# Altium PCB PCB2.PcbDoc
Units mm, origin at the board's own origin, x right, y up, seen from the top; angles counter-clockwise.
Board outline 23.5 x 23.5 mm, 2 copper layers (Top Layer, Bottom Layer); 5 components, 5 nets, 14 pads, 0 vias.
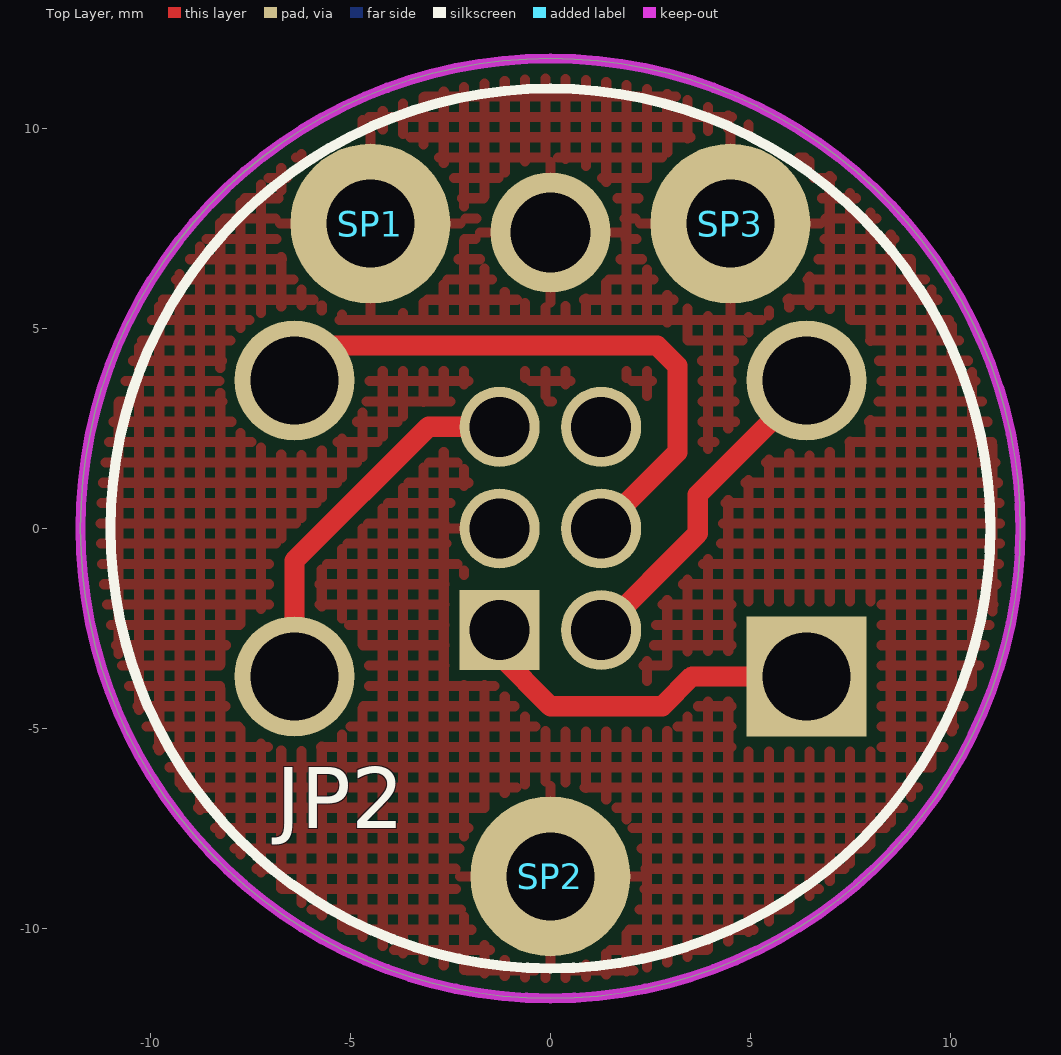
[diagram p0: Top Layer view]
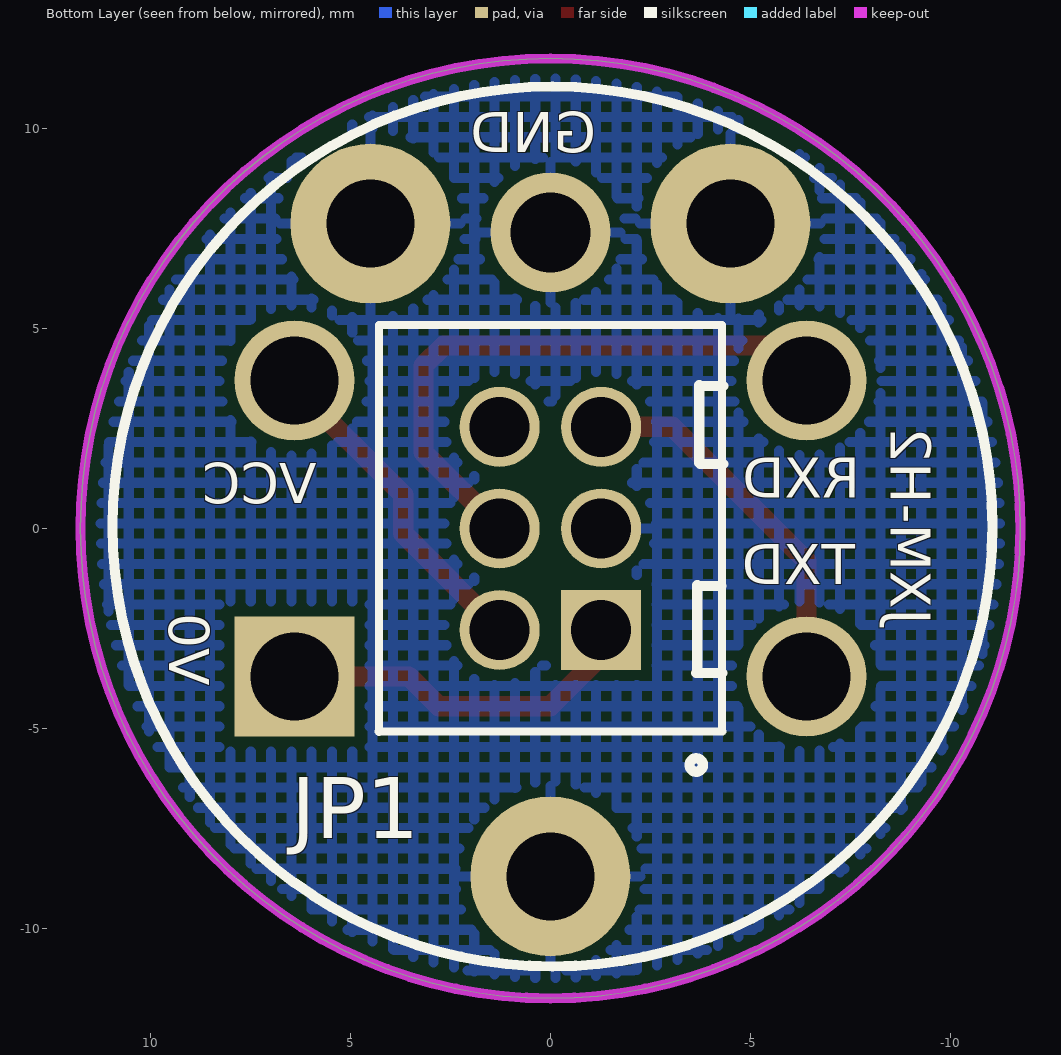
[diagram p1: Bottom Layer view, seen from below]

## Layer stack, top to bottom
Top Solder: solder mask 0.0102, Solder Resist, Dk 3.5
Top Layer: signal copper 0.0356
Dielectric 1: dielectric 0.32, FR-4, Dk 4.8
Bottom Layer: signal copper 0.0356
Bottom Solder: solder mask 0.0102, Solder Resist, Dk 3.5

## Board outline
-11.75,0 ccw(c0,0) 0,-11.75 ccw(c0,0) 11.75,0 ccw(c0,0) 0,11.75 ccw(c0,0)

## Design rules (kind name [scope] priority, off if disabled: settings)
Clearance [All] p1: gap=0.254
PolygonConnect [All] p1: connectstyle=Relief reliefconductorwidth=0.254 reliefentries=4 polygonreliefangle="90 Angle" airgapwidth=0.254
RoutingVias [All] p1: holewidth=0.711 width=1.27 viastyle="Through Hole" minholewidth=0.711 minwidth=1.27 maxholewidth=0.711 maxwidth=1.27
SolderMaskExpansion [All] p1: expansion=0.102
Width [All] p1: maxlimit=1.27 minlimit=0.254 preferedwidth=0.254
30 further rules are at their usual default settings.

## Components (designator, comment, footprint, x,y, rotation, side; value= is the part's Value field where it differs from the comment)
JP1 "Header3X2" HX25080-Y-A-PT -1.27,-2.54 r90 bottom
JP2 "HDR-1X5" JXM-H2 0,0 r0 top
SP1 "M2*5*3铜柱" M2*5*3#1 -10.287,13.97 r0 top
SP2 "M2*5*3铜柱" M2*5*3#2 -0.127,-8.763 r0 top
SP3 "M2*5*3铜柱" M2*5*3#3 4.445,7.62 r0 top

## Footprints (in the part's own frame and the unit in brackets; to place one, negate y for a bottom-side part, rotate by r counter-clockwise, add the part's x,y. Pads: shape width x height; smd on the part's side, far side on the other; paste and mask are expansions set on the pad)
HX25080-Y-A-PT [mm] "2.54双排插拔端子"
  rect 2x2 hole 1.5: 1(0,0)
  round 2 hole 1.5: 2(0,2.54) 3(2.54,0) 4(2.54,2.54) 5(5.08,0) 6(5.08,2.54)
  silkscreen extent -3.54,-3.05 7.62,5.57
JXM-H2 [mm] "电化学氢气传感器"
  rect 3x3 hole 2.2: 1(6.4,-3.7)
  round 3 hole 2.2: 2(6.4,3.7) 4(-6.4,3.7) 5(-6.4,-3.7)
  round 3 hole 2: 3(0,7.4)
  silkscreen extent -11,-11 11,11, body extent -7.9,-5.2 7.9,8.9, height 2
M2*5*3#1 [mm] "M螺丝孔，孔125Mil，焊盘200Mil"
  round 4 hole 2.2: 1(5.787,-6.35)
M2*5*3#2 [mm] "M螺丝孔，孔125Mil，焊盘200Mil"
  round 4 hole 2.2: 1(0.127,0.063)
M2*5*3#3 [mm] "M螺丝孔，孔125Mil，焊盘200Mil"
  round 4 hole 2.2: 1(0.055,0)

## Part data
JP1: library part "Header 3X2", "3*2P接插件"
JP2: library part "Header 5", "5P接插件"
SP1 SP2 SP3: library part 铜柱小焊盘, "铜柱"

## Nets (pads, with @x,y where several pads share a name; then routed paths per layer and width w, separated by ;. In a path a pad name is that pad's centre, name@x,y a point inside that pad or via, vN(x,y) a via of type N, cw(c..) or ccw(c..) an arc to the next point about the centre after c; other vN are vias at no path point)
GND: JP1.3 JP2.3 SP1.1 SP2.1 SP3.1
RXD: JP1.2 JP2.2 | length 8.2
  Top Layer w0.508: JP1.2 3.683,-0.127 3.683,0.839 JP2.2@6.4,3.556
TXD: JP1.1 JP2.1 | length 9.1
  Top Layer w0.508: JP1.1 -1.27,-3.175 0,-4.445 2.794,-4.445 3.539,-3.7 JP2.1
V0: JP1.5 JP2.5 | length 9.4
  Top Layer w0.508: JP2.5 -6.4,-0.812 -3.048,2.54 JP1.5
VCC: JP1.4 JP2.4 | length 15
  Top Layer w0.508: JP2.4 -5.528,4.572 2.667,4.572 3.175,4.064 3.175,1.905 JP1.4
pads on no net: JP1.6

## Polygon pours and split planes (outlines as drawn)
GND on Top Layer "Top Layer-No Net" (hatched 90Degree grid 0.508 track 0.254, remove dead copper, pour order 6): -13.843,13.716 -12.7,12.573 17.018,12.573 17.018,-9.271 13.081,-13.208 12.827,-13.462 -13.716,-13.462
GND on Bottom Layer "Top Layer-No Net" (hatched 90Degree grid 0.508 track 0.254, remove dead copper, pour order 8): -12.573,12.954 16.891,12.954 17.272,12.573 15.621,10.922 15.621,-12.065 -12.954,-12.065 -14.605,-13.716

## Keep-outs
Keep-Out Layer:
  circle w0.254: c0,0 r11.75

## Text inside footprints (layer, text, board x,y; h text height)
JP2: Bottom Overlay "TXD" at -7.62,-1.397 h1; Bottom Overlay "RXD" at -7.747,0.762 h1; Bottom Overlay "GND" at -1.143,9.398 h1; Bottom Overlay "VCC" at 5.842,0.635 h1; Bottom Overlay "V0" at 9.525,-3.937 h1 r90; Bottom Overlay "JXM-H2" at -8.509,-2.413 h1 r90